# EAGLE board pgb_tsc (EAGLE 9.7.0)
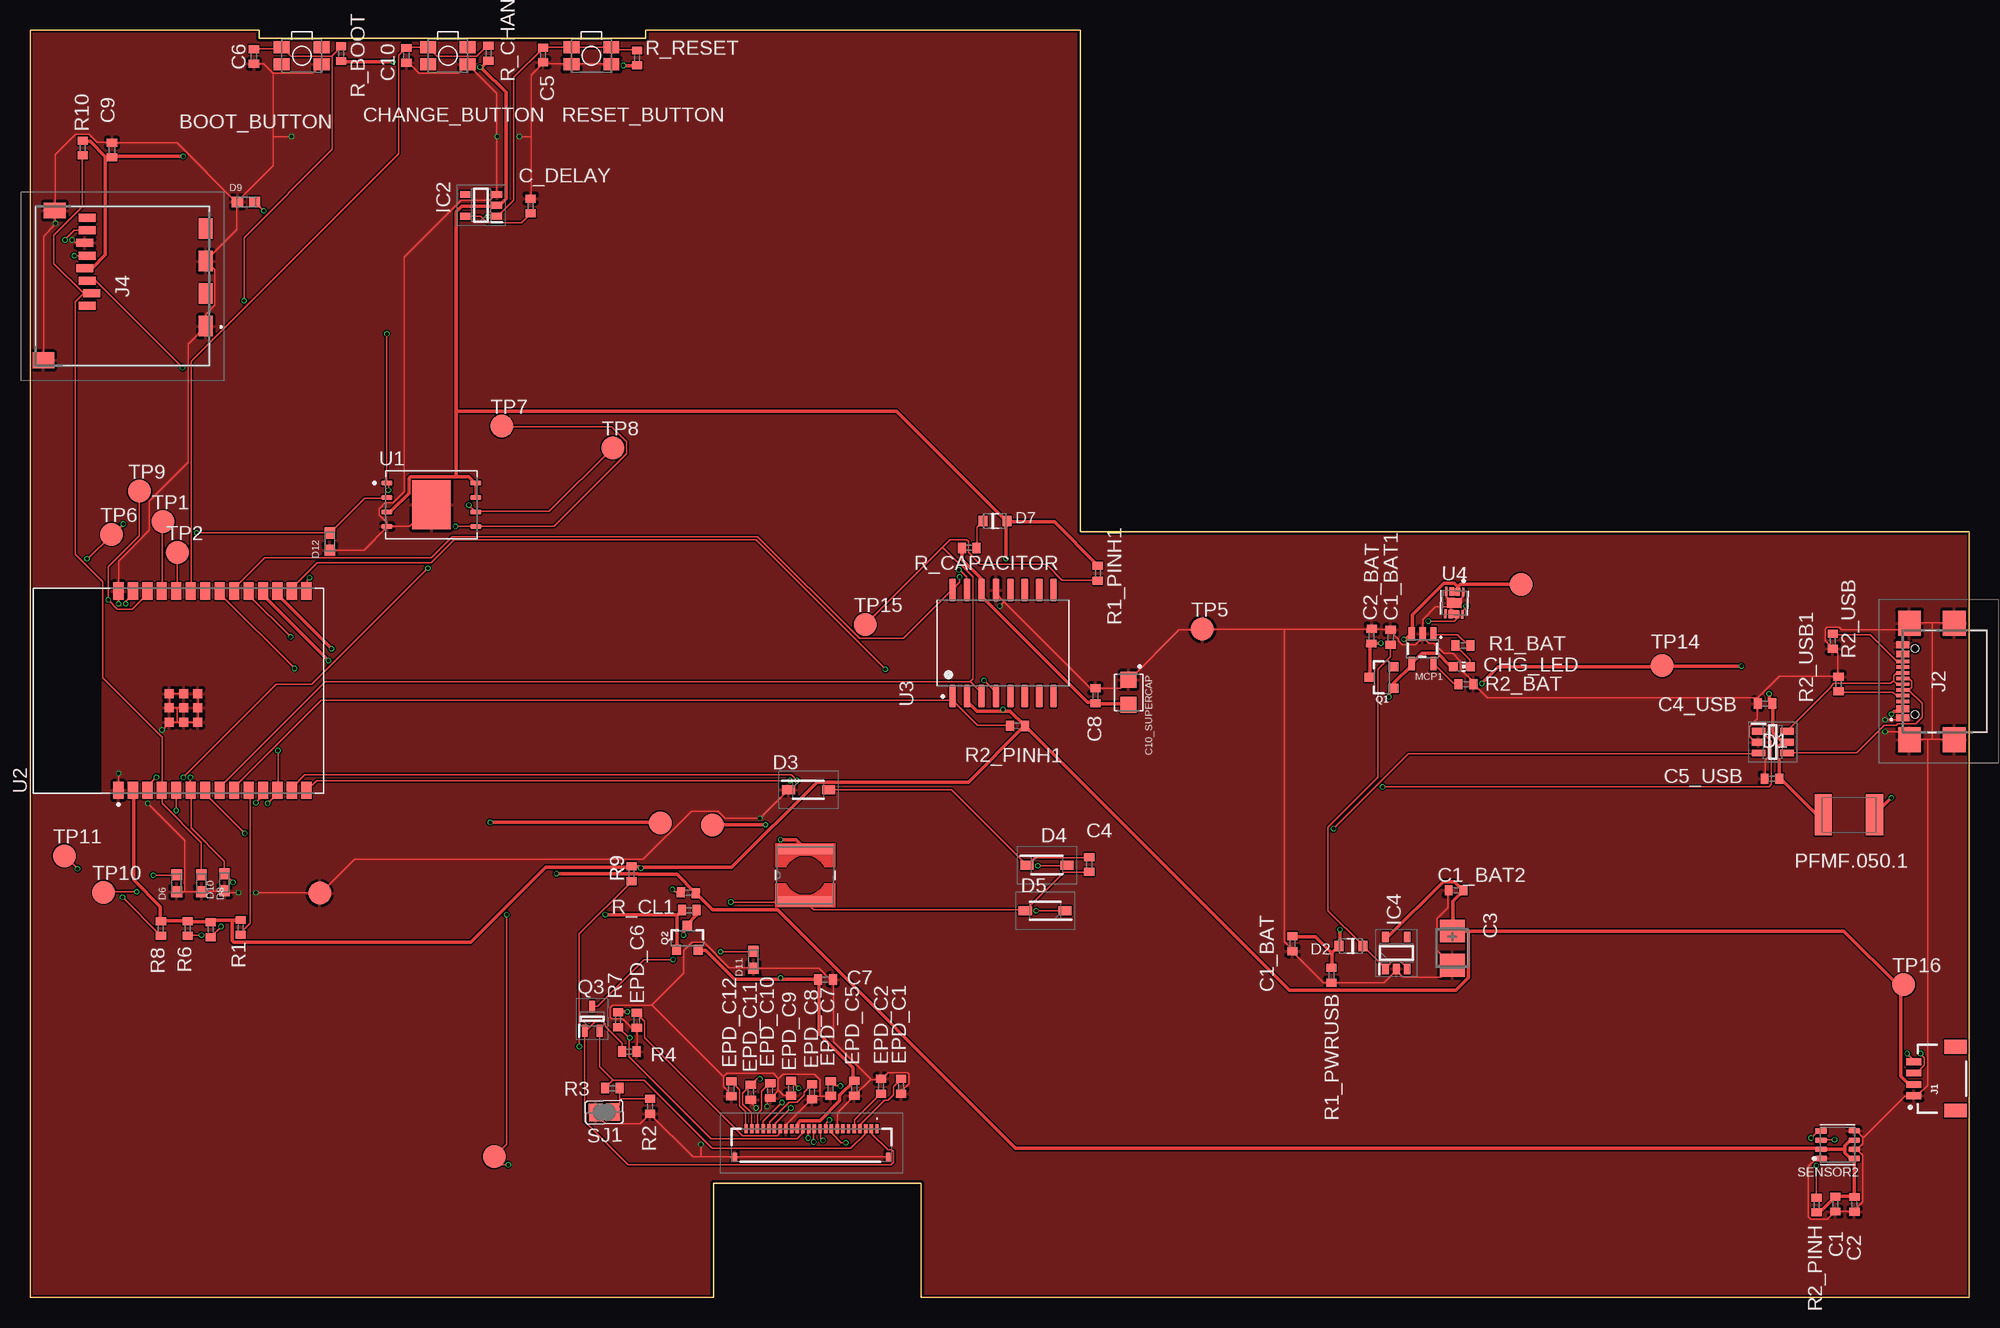
[diagram p0: board, top side]
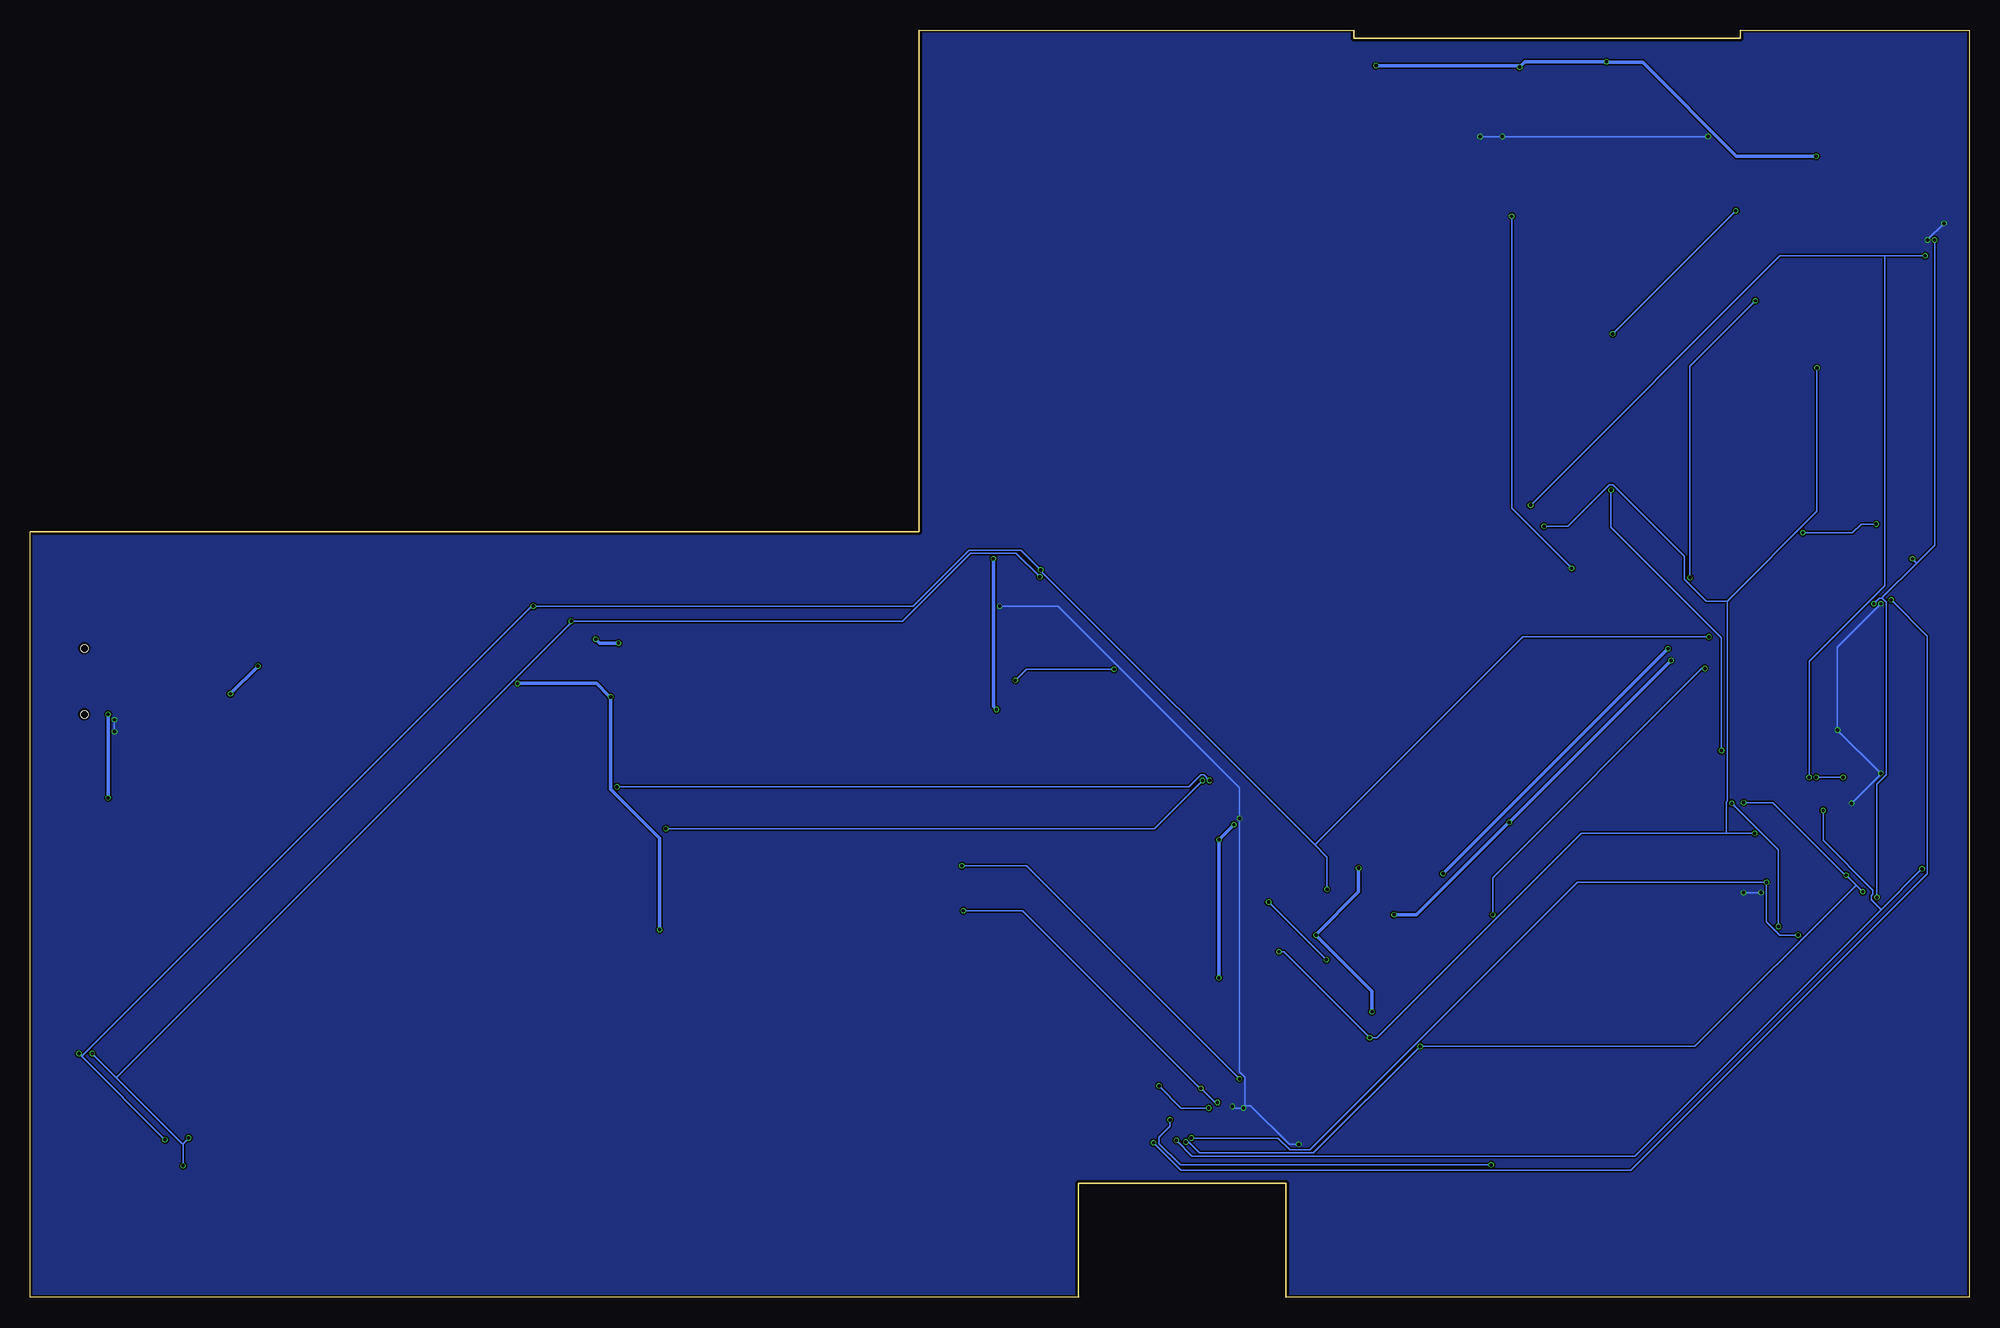
[diagram p1: board, bottom side, seen from below]

Size 170.2 x 111.2 mm. Coordinates in mm from the lower left corner, seen from the top.
Outline: 0,0 60,0 60,10 78.2,10 78.2,0 170.2,0 170.2,67.2 92.2,67.2 92.2,111.2 54,111.2 54,110.5 20.1,110.5 20.1,111.2 0,111.2 0,0
Copper layers (1*16): Top 0.035mm / dielectric 1.6mm / Bottom 0.035mm
Design rules "jlcpcb-2layers.dru *": minimum track width 5mil, minimum drill 0.3mm, track to track 5mil, track to pad 5mil, pad to pad 5mil, via to via 5mil, smd to smd 5mil, copper to edge 0.2mm, drill to drill 6mil, minimum pad ring 10mil, minimum via ring 3mil, stop-mask expansion 4mil, vias tented up to drill 0mil, thermal gap 10mil
Net classes: 0 default: width 0.15 mm; 1 power: width 0.3 mm

## Footprints (pad centres in the part's own frame; a part is rotated, then mirrored left to right if it is on the bottom)
MYBUTTON = smd 1.4 x 1.05: 1 1.75,0.75; 2 -1.75,0.75; 3 -1.75,-0.75; 4 1.75,-0.75
EAGLE-LTSPICE_C0402 = smd 0.7 x 0.9: 1 -0.65,0; 2 0.65,0
RCL_CT3528 = smd 2 x 2.2: + -1.5,0; - 1.5,0
CAPCP3225X100N = smd 1.4 x 1.4: 1 -1.1,0; 2 1.1,0
ADAFRUIT_CHIP-LED0603 = smd 0.8 x 0.8: A 0,-0.75; C 0,0.75
SOT95P280X145-6N = smd 1.2 x 0.6: 1 -1.25,0.95; 2 -1.25,0; 3 -1.25,-0.95; 4 1.25,-0.95; 5 1.25,0; 6 1.25,0.95
ESP32_WROVER_AVX---SD0805S020S1R0_AVX_SD0805S020S1R0_0 = smd 0.8 x 0.9: 1 -1.05,0; 2 1.05,0
SOD3716X135N = smd 1.15 x 0.8: 1 -1.75,0; 2 1.75,0
DIOC1608X36N = smd 0.97 x 0.94: 1 -0.75,0; 2 0.75,0
FH34SRJ24S05SH99 = smd 0.3 x 0.8: 1 5.75,1.45; 2 5.25,1.45; 3 4.75,1.45; 4 4.25,1.45; 5 3.75,1.45; 6 3.25,1.45; 7 2.75,1.45; 8 2.25,1.45; 9 1.75,1.45; 10 1.25,1.45; 11 0.75,1.45; 12 0.25,1.45; 13 -0.25,1.45; 14 -0.75,1.45; 15 -1.25,1.45; 16 -1.75,1.45; 17 -2.25,1.45; 18 -2.75,1.45; 19 -3.25,1.45; 20 -3.75,1.45; 21 -4.25,1.45; 22 -4.75,1.45; 23 -5.25,1.45; 24 -5.75,1.45 | smd 0.4 x 0.8: MP1 6.75,-1.05; MP2 -6.75,-1.05
SOT95P280X125-5N = smd 0.9 x 0.6: 1 -1.4,0.95; 2 -1.4,0; 3 -1.4,-0.95; 4 1.4,-0.95; 5 1.4,0.95
SOT95P280X120-5N = smd 0.9 x 0.6: 1 -1.4,0.95; 2 -1.4,0; 3 -1.4,-0.95; 4 1.4,-0.95; 5 1.4,0.95
JST04_1MM_RA = smd 0.6 x 1.35: 1 -1.5,0; 2 -0.5,0; 3 0.5,0; 4 1.5,0 | smd 1.2 x 2: NC1 2.8,-3.675; NC2 -2.8,-3.675
SAMACSYS_PARTS_USB4110GFA = smd 0.3 x 1.15: A1 -3.35,3.678; A4 -2.55,3.678; A5 -1.25,3.678; A6 -0.25,3.678; A7 0.25,3.678; A8 1.25,3.678; A9 2.55,3.678; A12 3.35,3.678; B1 3.05,3.678; B4 2.25,3.678; B5 1.75,3.678; B6 0.75,3.678; B7 -0.75,3.678; B8 -1.75,3.678; B9 -2.25,3.678; B12 -3.05,3.678 | smd 2.18 x 2: MP1 -5.11,-0.827; MP2 5.11,-0.827; MP3 -5.11,3.103; MP4 5.11,3.103 | hole 0.65: -2.89,2.603; 2.89,2.603
112ATAARR03ATTEND = smd 1.8 x 1.2: G1 10.6,10.4; G2 4.9,10.4; S1 7.75,10.4; S2 2.05,10.4 | smd 1.4 x 1.9: G3 13.6,-3.85; G4 0.45,-2.85 | smd 0.7 x 1.5: P1 8.8,0; P2 7.7,0.4; P3 6.6,0; P4 5.5,-0.2; P5 4.4,0; P6 3.3,-0.2; P7 2.2,0; P8 1.1,0
IND_4828-WE-TPC_WRE = smd 0.889 x 4.826: 1 -2.286,0; 2 2.286,0
ESP32_WROVER_SPARKFUN-IC-POWER_SOT23-5 = smd 0.55 x 1.2: 1 -0.95,-1.3; 2 0,-1.3; 3 0.95,-1.3; 4 0.95,1.3; 5 -0.95,1.3
ESP32C6_VARISTOR_CT/CN1812 = smd 1.5 x 3.6: 1 -2.25,0; 2 2.25,0
ESP32_WROVER_SPARKFUN-DISCRETESEMI_SOT23-3 = smd 0.8 x 0.9: 1 -0.95,-1; 2 0.95,-1; 3 0,1.1
SOT65P210X110-3N = smd 1.05 x 0.5: 1 -1.05,0.65; 2 -1.05,-0.65; 3 1.05,0
ESP32_WROVER_EAGLE-LTSPICE_R0402 = smd 0.7 x 0.9: 1 -0.65,0; 2 0.65,0
ESP32_WROVER_BME680_PSON80P300X300X100-8N = smd 1.016 x 0.5: 1 1.458,1.2; 2 1.458,0.4; 3 1.458,-0.4; 4 1.458,-1.2; 5 -1.458,-1.22; 6 -1.458,-0.4; 7 -1.458,0.4; 8 -1.458,1.2
SJ = smd 1.168 x 1.6: 1 -0.762,0; 2 0.762,0
TP20R = smd 2 x 2: TP 0,0
SON127P600X800X80-9N = smd 0.94 x 0.44: 1 -3.895,1.905; 2 -3.895,0.635; 3 -3.895,-0.635; 4 -3.895,-1.905; 5 3.895,-1.905; 6 3.895,-0.635; 7 3.895,0.635; 8 3.895,1.905 | smd 3.4 x 4.3: 9 0,0
XCVR_ESP32-C6-WROOM-1-N8 = smd 1.5 x 0.9: 1 -8.75,5.26; 2 -8.75,3.99; 3 -8.75,2.72; 4 -8.75,1.45; 5 -8.75,0.18; 6 -8.75,-1.09; 7 -8.75,-2.36; 8 -8.75,-3.63; 9 -8.75,-4.9; 10 -8.75,-6.17; 11 -8.75,-7.44; 12 -8.75,-8.71; 13 -8.75,-9.98; 14 -8.75,-11.25; 15 8.75,-11.25; 16 8.75,-9.98; 17 8.75,-8.71; 18 8.75,-7.44; 19 8.75,-6.17; 20 8.75,-4.9; 21 8.75,-3.63; 22 8.75,-2.36; 23 8.75,-1.09; 24 8.75,0.18; 25 8.75,1.45; 26 8.75,2.72; 27 8.75,3.99; 28 8.75,5.26 | smd 0.8 x 0.8: 29_1 -2.755,0.79; 29_2 -1.505,0.79; 29_3 -0.255,0.79; 29_4 -2.755,-0.46; 29_5 -1.505,-0.46; 29_6 -0.255,-0.46; 29_7 -2.755,-1.71; 29_8 -1.505,-1.71; 29_9 -0.255,-1.71
SOIC127P1032X265-16N = smd 2.05 x 0.59: 1 -4.655,4.445; 2 -4.655,3.175; 3 -4.655,1.905; 4 -4.655,0.635; 5 -4.655,-0.635; 6 -4.655,-1.905; 7 -4.655,-3.175; 8 -4.655,-4.445; 9 4.655,-4.445; 10 4.655,-3.175; 11 4.655,-1.905; 12 4.655,-0.635; 13 4.655,0.635; 14 4.655,1.905; 15 4.655,3.175; 16 4.655,4.445
SON50P200X200X80-9N = smd 0.76 x 0.27: 1 -0.985,0.75; 4 -0.985,-0.75; 5 0.985,-0.75; 8 0.985,0.75 | smd 0.762 x 0.483: 2 -0.985,0.25; 3 -0.985,-0.25; 6 0.985,-0.25; 7 0.985,0.25 | smd 0.9 x 1.3: 9 0,0

## Placement (x,y rotation side)
BOOT_BUTTON  BUTTON_CUSYOMV1  [MYBUTTON]  23.84,108.95 180 top
C1  100nF  [EAGLE-LTSPICE_C0402]  158.44,8.19 270 top
C1_BAT  4.7uF  [EAGLE-LTSPICE_C0402]  110.79,31.03 270 top
C1_BAT1  4.7uF  [EAGLE-LTSPICE_C0402]  119.41,57.93 90 top
C1_BAT2  4.7uF  [EAGLE-LTSPICE_C0402]  125.15,35.73 180 top
C2  100nF  [EAGLE-LTSPICE_C0402]  160.12,8.16 270 top
C2_BAT  4.7uF  [EAGLE-LTSPICE_C0402]  117.73,58.03 88.3 top
C3  100uF TANT  [RCL_CT3528]  124.82,30.65 270 top
C4  4.7uF/25V  [EAGLE-LTSPICE_C0402]  92.95,37.99 270 top
C4_USB  100nF  [EAGLE-LTSPICE_C0402]  152.27,52.11 180 top
C5  1uF  [EAGLE-LTSPICE_C0402]  45.02,109.02 270 top
C5_USB  4.7uF  [EAGLE-LTSPICE_C0402]  152.88,45.51 180 top
C6  100nF  [EAGLE-LTSPICE_C0402]  19.64,108.89 270 top
C7  10uF  [EAGLE-LTSPICE_C0402]  69.8,27.89 0 top
C8  100nF  [EAGLE-LTSPICE_C0402]  93.5,52.79 90 top
C9  100nF  [EAGLE-LTSPICE_C0402]  7.18,100.69 90 top
C10  100nF  [EAGLE-LTSPICE_C0402]  33.02,108.99 270 top
C10_SUPERCAP  CPH3225A  [CAPCP3225X100N]  96.4,53.1 270 top
C_DELAY  100nF  [EAGLE-LTSPICE_C0402]  43.93,95.77 270 top
CHANGE_BUTTON  BUTTON_CUSYOMV1  [MYBUTTON]  36.66,108.95 180 top
CHG_LED  [ADAFRUIT_CHIP-LED0603]  125.67,55.35 270 top
D1  USBLC6-2SC6Y  [SOT95P280X145-6N]  152.95,48.73 0 top
D2  ESP32_WROVER_AVX---SD0805S020S1R0_AVX_SD0805S020S1R0_0_0AVX_SD0805S020S1R0_0_0  [ESP32_WROVER_AVX---SD0805S020S1R0_AVX_SD0805S020S1R0_0]  115.92,30.84 180 top
D3  MBR0530  [SOD3716X135N]  68.31,44.54 0 top
D4  MBR0530  [SOD3716X135N]  89.25,37.94 0 top
D5  MBR0530  [SOD3716X135N]  89.09,33.94 180 top
D6  PGB1010603MR  [DIOC1608X36N]  12.85,36.34 90 top
D7  ESP32_WROVER_AVX---SD0805S020S1R0_AVX_SD0805S020S1R0_0_0AVX_SD0805S020S1R0_0_0  [ESP32_WROVER_AVX---SD0805S020S1R0_AVX_SD0805S020S1R0_0]  84.67,68.14 0 top
D8  PGB1010603MR  [DIOC1608X36N]  15.03,36.34 90 top
D9  PGB1010603MR  [DIOC1608X36N]  18.94,96.13 0 top
D10  PGB1010603MR  [DIOC1608X36N]  17.06,36.43 90 top
D11  PGB1010603MR  [DIOC1608X36N]  63.48,29.63 90 top
D12  PGB1010603MR  [DIOC1608X36N]  26.3,66.33 90 top
EPD_C1  1uF/50V  [EAGLE-LTSPICE_C0402]  76.43,18.53 90 top
EPD_C2  1uF/50V  [EAGLE-LTSPICE_C0402]  74.69,18.53 270 top
EPD_C5  0.1uF/50V  [EAGLE-LTSPICE_C0402]  72.33,18.35 90 top
EPD_C6  1uF/50V  [EAGLE-LTSPICE_C0402]  53.25,24.33 90 top
EPD_C7  1uF/50V  [EAGLE-LTSPICE_C0402]  70.26,18.33 90 top
EPD_C8  1uF/50V  [EAGLE-LTSPICE_C0402]  68.63,18.05 90 top
EPD_C9  1uF/50V  [EAGLE-LTSPICE_C0402]  66.79,18.35 90 top
EPD_C10  1uF/50V  [EAGLE-LTSPICE_C0402]  64.95,18.15 90 top
EPD_C11  1uF/50V  [EAGLE-LTSPICE_C0402]  63.25,18.01 90 top
EPD_C12  1uF/50V  [EAGLE-LTSPICE_C0402]  61.54,18.31 90 top
FH34SRJ-24S-0.5SH_99_1  FH34SRJ-24S-0.5SH_99_  [FH34SRJ24S05SH99]  68.58,13.35 0 top
IC2  BD5229G-TR  [SOT95P280X125-5N]  39.57,95.83 180 top
IC4  XC6220A331MR-G  [SOT95P280X120-5N]  119.91,30.23 90 top
J1  QWIIC_RIGHT_ANGLE  [JST04_1MM_RA]  165.32,19.19 90 top
J2  SAMACSYS_PARTS_USB4110-GF-A  [SAMACSYS_PARTS_USB4110GFA]  168.06,54.06 90 top
J4  112A-TAAR-R03_ATTEND  [112ATAARR03ATTEND]  5,95.83 270 top
L1  68uH  [IND_4828-WE-TPC_WRE]  68.03,37.05 89.9 top
MCP1  ESP32_WROVER_SPARKFUN-IC-POWER_MCP73831  [ESP32_WROVER_SPARKFUN-IC-POWER_SOT23-5]  122.21,56.92 180 top
PFMF.050.1  ESP32C6_VARISTORCN1812  [ESP32C6_VARISTOR_CT/CN1812]  159.63,42.34 180 top
Q1  20V/4.2A/52mΩ/1.4W  [ESP32_WROVER_SPARKFUN-DISCRETESEMI_SOT23-3]  118.66,54.41 90 top
Q2  20V/4.2A/52mΩ/1.4W  [ESP32_WROVER_SPARKFUN-DISCRETESEMI_SOT23-3]  57.68,31.51 0 top
Q3  SI1308EDL-T1-GE3  [SOT65P210X110-3N]  49.32,24.44 90 top
R1  10k  [ESP32_WROVER_EAGLE-LTSPICE_R0402]  18.47,32.47 90 top
R1_BAT  200  [ESP32_WROVER_EAGLE-LTSPICE_R0402]  125.76,57.21 0 top
R1_PINH  10k  [ESP32_WROVER_EAGLE-LTSPICE_R0402]  57.76,35.51 356.7 top
R1_PINH1  10k  [ESP32_WROVER_EAGLE-LTSPICE_R0402]  93.71,63.55 270 top
R1_PWRUSB  100k  [ESP32_WROVER_EAGLE-LTSPICE_R0402]  114.22,28.27 90 top
R2  2.2  [ESP32_WROVER_EAGLE-LTSPICE_R0402]  54.41,16.77 90 top
R2_BAT  2K  [ESP32_WROVER_EAGLE-LTSPICE_R0402]  126.02,53.81 180 top
R2_PINH  10k  [ESP32_WROVER_EAGLE-LTSPICE_R0402]  156.8,8.11 270 top
R2_PINH1  10k  [ESP32_WROVER_EAGLE-LTSPICE_R0402]  86.65,50.15 179.6 top
R2_USB  5k1  [ESP32_WROVER_EAGLE-LTSPICE_R0402]  158.23,57.59 270 top
R2_USB1  5k1  [ESP32_WROVER_EAGLE-LTSPICE_R0402]  158.72,53.83 270 top
R3  0.47  [ESP32_WROVER_EAGLE-LTSPICE_R0402]  51.09,18.37 180 top
R4  10k  [ESP32_WROVER_EAGLE-LTSPICE_R0402]  52.59,21.57 180 top
R5  10K  [ESP32_WROVER_EAGLE-LTSPICE_R0402]  15.85,32.27 90 top
R6  10K  [ESP32_WROVER_EAGLE-LTSPICE_R0402]  13.83,32.37 90 top
R7  10K  [ESP32_WROVER_EAGLE-LTSPICE_R0402]  51.61,24.37 90 top
R8  10K  [ESP32_WROVER_EAGLE-LTSPICE_R0402]  11.47,32.37 90 top
R9  10K  [ESP32_WROVER_EAGLE-LTSPICE_R0402]  52.79,37.17 90 top
R10  10K  [ESP32_WROVER_EAGLE-LTSPICE_R0402]  4.61,100.87 90 top
R_BOOT  10K  [ESP32_WROVER_EAGLE-LTSPICE_R0402]  27.29,109.15 270 top
R_CAPACITOR  15  [ESP32_WROVER_EAGLE-LTSPICE_R0402]  82.42,65.77 0 top
R_CHANGE  10K  [ESP32_WROVER_EAGLE-LTSPICE_R0402]  40.22,109.17 270 top
R_CL1  10k  [ESP32_WROVER_EAGLE-LTSPICE_R0402]  57.86,33.99 0 top
R_RESET  10K  [ESP32_WROVER_EAGLE-LTSPICE_R0402]  53.26,108.77 270 top
RESET_BUTTON  BUTTON_CUSYOMV1  [MYBUTTON]  49.26,108.95 180 top
SENSOR2  ESP32_WROVER_BME680_BME680  [ESP32_WROVER_BME680_PSON80P300X300X100-8N]  158.64,13.4 180 top
SJ1  [SJ]  50.38,16.25 2.2 top
TP1  TPTP20R  [TP20R]  11.66,68.07 0 top
TP2  TPTP20R  [TP20R]  12.91,65.37 0 top
TP3  TPTP20R  [TP20R]  130.86,62.57 0 top
TP4  TPTP20R  [TP20R]  25.41,35.47 0 top
TP5  TPTP20R  [TP20R]  102.89,58.65 0 top
TP6  TPTP20R  [TP20R]  7.14,66.95 0 top
TP7  TPTP20R  [TP20R]  41.39,76.45 0 top
TP8  TPTP20R  [TP20R]  51.14,74.55 0 top
TP9  TPTP20R  [TP20R]  9.59,70.75 0 top
TP10  TPTP20R  [TP20R]  6.44,35.55 0 top
TP11  TPTP20R  [TP20R]  2.99,38.75 0 top
TP12  TPTP20R  [TP20R]  40.74,12.35 0 top
TP13  TPTP20R  [TP20R]  55.29,41.65 0 top
TP14  TPTP20R  [TP20R]  143.24,55.45 0 top
TP15  TPTP20R  [TP20R]  73.29,59.05 0 top
TP16  TPTP20R  [TP20R]  164.44,27.45 0 top
TP17  TPTP20R  [TP20R]  59.89,41.45 0 top
U1  W25Q512JVEIQ  [SON127P600X800X80-9N]  35.22,69.56 0 top
U2  ESP32-C6-WROOM-1-N8  [XCVR_ESP32-C6-WROOM-1-N8]  13,53.24 90 top
U3  DS3231SN#  [SOIC127P1032X265-16N]  85.39,57.42 90 top
U4  MAX17048G+T10  [SON50P200X200X80-9N]  125,60.95 267.8 top

## Library data of the parts
BOOT_BUTTON CHANGE_BUTTON CHG_LED PFMF.050.1 RESET_BUTTON SJ1 TP1-TP17 = DeskAssistant v19 v1
C1 C1_BAT C1_BAT1 C1_BAT2 C2 C2_BAT C4 C4_USB C5 C5_USB C6-C10 C_DELAY EPD_C1 EPD_C2 EPD_C5-EPD_C12 = DeskAssistant v19 v1; SPICEMODEL: NONE; SPICEPREFIX: C
C3 = DeskAssistant v19 v1; SPICEPREFIX: C
C10_SUPERCAP = DeskAssistant v19 v1; AVAILABILITY: Not in stock; CHECK_PRICES: https://www.snapeda.com/parts/CPH3225A/Seiko+Instruments/view-part/?ref=eda; DESCRIPTION: 11 mF (EDLC) Supercapacitor 3.3 V 1210 (3225 Metric) - -; MF: Seiko Instruments; MP: CPH3225A; PACKAGE: 1210 Seiko; PRICE: None; PURCHASE-URL: https://www.snapeda.com/api/url_track_click_mouser/?unipart_id=562593&manufacturer=Seiko Instruments&part_name=CPH3225A&search_term=None; SNAPEDA_LINK: https://www.snapeda.com/parts/CPH3225A/Seiko+Instruments/view-part/?ref=snap
D1 = DeskAssistant v19 v1; AVAILABILITY: In Stock; CHECK_PRICES: https://www.snapeda.com/parts/USBLC6-2SC6Y/STMicroelectronics/view-part/?ref=eda; DESCRIPTION: 17V Clamp 5A (8/20µs) Ipp Tvs Diode Surface Mount SOT-23-6; MF: STMicroelectronics; MP: USBLC6-2SC6Y; PACKAGE: SOT-23-6 STMicroelectronics; PRICE: None; SNAPEDA_LINK: https://www.snapeda.com/parts/USBLC6-2SC6Y/STMicroelectronics/view-part/?ref=snap
D2 D7 = DeskAssistant v19 v1; CENTROID_NOT_SPECIFIED: No; DATASHEET: http://datasheets.avx.com/schottky.pdf; DIGIKEY_DESCRIPTION: DIODE SCHOTTKY 20V 1A 0805; DIGIKEY_PART_NUMBER: 478-7800-1-ND; LEAD_FREE: yes; MF: AVX; MOUSER_PART_NUMBER: 581-SD0805S020S1R0; PACKAGE: 0805 (2012 metric); PREFIX: D; ROHS: yes; TEMPERATURE_RANGE_HIGH: +125°C; TEMPERATURE_RANGE_LOW: -55°C
D3-D5 = DeskAssistant v19 v1; AVAILABILITY: In Stock; CHECK_PRICES: https://www.snapeda.com/parts/MBR0530/Onsemi/view-part/?ref=eda; DESCRIPTION: Diode Schottky 30 V 500mA Surface Mount SOD-123; MF: ON Semiconductor; MP: MBR0530; PACKAGE: SOD-123-2 ON Semiconductor; PRICE: None; PURCHASE-URL: https://www.snapeda.com/api/url_track_click_mouser/?unipart_id=179458&manufacturer=ON Semiconductor&part_name=MBR0530&search_term=None; SNAPEDA_LINK: https://www.snapeda.com/parts/MBR0530/Onsemi/view-part/?ref=snap
D6 D8-D12 = DeskAssistant v19 v1; AVAILABILITY: In Stock; CHECK_PRICES: https://www.snapeda.com/parts/PGB1010603MR/Littelfuse/view-part/?ref=eda; DESCRIPTION: 150V (Typ) Clamp - Ipp Tvs Diode Surface Mount 0603 (1608 Metric); MF: Littelfuse Inc.; MP: PGB1010603MR; PACKAGE: 0603 Littelfuse Inc.; PRICE: None; PURCHASE-URL: https://www.snapeda.com/api/url_track_click_mouser/?unipart_id=5659453&manufacturer=Littelfuse Inc.&part_name=PGB1010603MR&search_term=None; SNAPEDA_LINK: https://www.snapeda.com/parts/PGB1010603MR/Littelfuse/view-part/?ref=snap
FH34SRJ-24S-0.5SH_99_1 = DeskAssistant v19 v1; DESCRIPTION: 24 Position FFC, FPC Connector Contacts, Top and Bottom 0.020" (0.50mm) Surface Mount, Right Angle; HEIGHT: 1.1mm; MANUFACTURER_NAME: Hirose; MANUFACTURER_PART_NUMBER: FH34SRJ-24S-0.5SH(99); MOUSER_PART_NUMBER: 798-FH34SRJ24S05SH99; MOUSER_PRICE-STOCK: https://www.mouser.co.uk/ProductDetail/Hirose-Connector/FH34SRJ-24S-0.5SH99?qs=vcbW%252B4%252BSTIpKBl5ap9J8Fw%3D%3D
IC2 = DeskAssistant v19 v1; DESCRIPTION: Voltage Detector with Adjustable Delay Time: CMOS processes are utilized to develop high precision, low current consumption CMOS reset ICs that allow arbitrary setting of the delay time. The extensive lineup includes both Nch Open Drain and CMOS output types in a wide range of detection voltages (from 2.3V to 6.0V, in 0.1V steps), enabling selection of the ideal solution based on customer requirements. In addition, the entire series is of course both lead-free and RoHS-compliant.; HEIGHT: 1.25mm; MANUFACTURER_NAME: ROHM Semiconductor; MANUFACTURER_PART_NUMBER: BD5229G-TR; MOUSER_PART_NUMBER: 755-BD5229G-TR; MOUSER_PRICE-STOCK: https://www.mouser.co.uk/ProductDetail/ROHM-Semiconductor/BD5229G-TR?qs=4kLU8WoGk0vvnhrrYwdszw%3D%3D
IC4 = DeskAssistant v19 v1; DESCRIPTION: LDO Voltage Regulators; HEIGHT: 1.2mm; MANUFACTURER_NAME: Torex; MANUFACTURER_PART_NUMBER: XC6220A331MR-G; MOUSER_PART_NUMBER: 865-XC6220A331MR-G; MOUSER_PRICE-STOCK: https://www.mouser.co.uk/ProductDetail/Torex-Semiconductor/XC6220A331MR-G?qs=AsjdqWjXhJ8ZSWznL1J0gg%3D%3D
J1 = DeskAssistant v19 v1; PROD_ID: CONN-13694
J2 = DeskAssistant v19 v1; DESCRIPTION: CONN USB 2.0 TYPE-C R/A SMT; HEIGHT: 3.26mm; MANUFACTURER_NAME: GCT (GLOBAL CONNECTOR TECHNOLOGY); MANUFACTURER_PART_NUMBER: USB4110-GF-A; MOUSER_PART_NUMBER: 640-USB4110-GF-A; MOUSER_PRICE-STOCK: https://www.mouser.co.uk/ProductDetail/GCT/USB4110-GF-A?qs=KUoIvG%2F9IlYiZvIXQjyJeA%3D%3D
J4 = DeskAssistant v19 v1; DESCRIPTION: Micro SD Card Socket, Push-Push Type, Top Mount, SMT, H=1.83mm, 10u; HEIGHT: 1.9mm; MANUFACTURER_NAME: ATTEND; MANUFACTURER_PART_NUMBER: 112A-TAAR-R03 ATTEND
L1 = DeskAssistant v19 v1; COPYRIGHT: Copyright (C) 2024 Ultra Librarian. All rights reserved.; MANUFACTURER_PART_NUMBER: 744043680; MFR_NAME: Wurth Electronics
MCP1 = DeskAssistant v19 v1; PROD_ID: IC-09995
Q1 Q2 = DeskAssistant v19 v1; PROD_ID: TRAN-14388
Q3 = DeskAssistant v19 v1; AVAILABILITY: In Stock; CHECK_PRICES: https://www.snapeda.com/parts/SI1308EDL-T1-GE3/Vishay+Siliconix/view-part/?ref=eda; DESCRIPTION: Si1308EDL-T1-GE3 N-channel MOSFET Transistor, 1.5 A, 30 V, 3-Pin SC-70 | Siliconix / Vishay SI1308EDL-T1-GE3; MF: Vishay Siliconix; MP: SI1308EDL-T1-GE3; PACKAGE: SOT-323 Vishay Semiconductor; PRICE: None; PURCHASE-URL: https://www.snapeda.com/api/url_track_click_mouser/?unipart_id=274603&manufacturer=Vishay Siliconix&part_name=SI1308EDL-T1-GE3&search_term=None; SNAPEDA_LINK: https://www.snapeda.com/parts/SI1308EDL-T1-GE3/Vishay+Siliconix/view-part/?ref=snap
R1 R1_BAT R1_PINH R1_PINH1 R1_PWRUSB R2 R2_BAT R2_PINH R2_PINH1 R2_USB R2_USB1 R3-R10 R_BOOT R_CAPACITOR R_CHANGE R_CL1 R_RESET = DeskAssistant v19 v1; SPICEMODEL: NONE; SPICEPREFIX: R
SENSOR2 = DeskAssistant v19 v1; AVAILABILITY: Unavailable; DESCRIPTION: Integrated Environmental Unit; MF: Bosch Sensortec; MP: BME680; PACKAGE: LGA-8 Bosch Tools; PRICE: None
U1 = DeskAssistant v19 v1; AVAILABILITY: In Stock; CHECK_PRICES: https://www.snapeda.com/parts/W25Q512JVEIQ/Winbond+Electronics/view-part/?ref=eda; DESCRIPTION: FLASH - NOR Memory IC 512Mb (64M x 8) SPI - Quad I/O 133 MHz 8-WSON (8x6); MF: Winbond Electronics; MP: W25Q512JVEIQ; PACKAGE: Package; PRICE: None; SNAPEDA_LINK: https://www.snapeda.com/parts/W25Q512JVEIQ/Winbond+Electronics/view-part/?ref=snap
U2 = DeskAssistant v19 v1; AVAILABILITY: In Stock; CHECK_PRICES: https://www.snapeda.com/parts/ESP32-C6-WROOM-1-N8/Espressif+Systems/view-part/?ref=eda; DESCRIPTION: Multiprotocol Modules ESP32-C6 module, Wi-Fi 6 in 2.4 GHz band, Bluetooth 5, Zigbee 3.0 and Thread. ESP34-WROOM Compatible - ENGINEERING SAMPLE; MF: Espressif Systems; MP: ESP32-C6-WROOM-1-N8; PACKAGE: None; PRICE: None; SNAPEDA_LINK: https://www.snapeda.com/parts/ESP32-C6-WROOM-1-N8/Espressif+Systems/view-part/?ref=snap
U3 = DeskAssistant v19 v1; AVAILABILITY: In Stock; CHECK_PRICES: https://www.snapeda.com/parts/DS3231SN%23/Analog+Devices/view-part/?ref=eda; DESCRIPTION: Extremely Accurate I²C-Integrated RTC/TCXO/Crystal; MF: Analog Devices; MP: DS3231SN#; PACKAGE: SOIC-16 Maxim; PRICE: None; PURCHASE-URL: https://www.snapeda.com/api/url_track_click_mouser/?unipart_id=99048&manufacturer=Analog Devices&part_name=DS3231SN#&search_term=None; SNAPEDA_LINK: https://www.snapeda.com/parts/DS3231SN%23/Analog+Devices/view-part/?ref=snap
U4 = DeskAssistant v19 v1; AVAILABILITY: In Stock; CHECK_PRICES: https://www.snapeda.com/parts/MAX17048G+T10/Analog+Devices/view-part/?ref=eda; DESCRIPTION: 3µA 1-Cell/2-Cell Fuel Gauge with ModelGauge; MF: Analog Devices; MP: MAX17048G+T10; PACKAGE: TDFN-8 Maxim; PRICE: None; PURCHASE-URL: https://www.snapeda.com/api/url_track_click_mouser/?unipart_id=329239&manufacturer=Analog Devices&part_name=MAX17048G+T10&search_term=None; SNAPEDA_LINK: https://www.snapeda.com/parts/MAX17048G+T10/Analog+Devices/view-part/?ref=snap

## Nets
3V3 [power]: C1_BAT2.1 C3.+ C9.1 D7.2 IC2.2 IC4.5 J1.2 J4.P4 Q2.3 R1.2 R1_PINH1.1 R2_PINH1.1 R5.2 R6.2 R7.2 R8.2 R9.2 R10.2 R_BOOT.2 R_CHANGE.2 R_CL1.2 R_RESET.2 TP16.TP U1.3 U1.7 U1.8 U2.2 U3.2
32KHZ: R2_PINH1.2 U2.9 U3.1
DN: D1.4 J2.A7 J2.B7
DP: D1.6 J2.A6 J2.B6
EPD_3V3 [power]: C7.1 EPD_C5.2 FH34SRJ-24S-0.5SH_99_1.15 FH34SRJ-24S-0.5SH_99_1.16 L1.2 Q2.2 TP17.TP
EPD_3V3_C [power]: Q2.1 R_CL1.1 TP13.TP U2.18
EPD_BUSY: FH34SRJ-24S-0.5SH_99_1.9 TP9.TP U2.26
EPD_CS: D6.2 FH34SRJ-24S-0.5SH_99_1.12 R9.1 TP10.TP U2.11
EPD_DC: FH34SRJ-24S-0.5SH_99_1.11 TP11.TP U2.5
EPD_RST: FH34SRJ-24S-0.5SH_99_1.10 TP12.TP U2.21
FLASH_CS: D9.2 R5.1 U1.1 U2.12
GDR: FH34SRJ-24S-0.5SH_99_1.2 Q3.1 R4.2
GND: BOOT_BUTTON.2 C1.2 C1_BAT1.2 C1_BAT2.2 C1_BAT.2 C2.2 C2_BAT.2 C3.- C4_USB.2 C5.2 C5_USB.2 C6.2 C7.2 C8.2 C9.2 C10.2 C10_SUPERCAP.1 C_DELAY.1 CHANGE_BUTTON.2 D1.2 D3.1 D6.1 D8.1 D9.1 D10.1 D11.1 D12.1 EPD_C1.1 EPD_C2.1 EPD_C5.1 EPD_C6.1 EPD_C7.1 EPD_C8.1 EPD_C9.1 EPD_C10.1 EPD_C11.1 EPD_C12.1 FH34SRJ-24S-0.5SH_99_1.8 FH34SRJ-24S-0.5SH_99_1.17 FH34SRJ-24S-0.5SH_99_1.MP1 FH34SRJ-24S-0.5SH_99_1.MP2 IC2.3 IC4.2 J1.1 J2.A1 J2.A12 J2.B1 J2.B12 J2.MP1 J2.MP2 J2.MP3 J2.MP4 J4.G1 J4.G2 J4.G3 J4.G4 J4.P6 MCP1.2 R1_PWRUSB.1 R2.1 R2_BAT.1 R2_USB1.1 R2_USB.2 R4.1 RESET_BUTTON.1 RESET_BUTTON.2 SENSOR2.1 SENSOR2.5 SENSOR2.7 SJ1.1 TP4.TP TP5.TP U1.4 U1.9 U2.1 U2.28 U2.29_1 U2.29_2 U2.29_3 U2.29_4 U2.29_5 U2.29_6 U2.29_7 U2.29_8 U2.29_9 U3.13 U4.1 U4.4 U4.6 U4.9
GPIO8: R1.1 U2.10
I2C_PW [power]: C1.1 C2.1 R1_PINH.2 R2_PINH.2 SENSOR2.2 SENSOR2.6 SENSOR2.8 U2.17
INT_RTC: R1_PINH1.2 TP15.TP U2.8 U3.3
IO/BOOT: BOOT_BUTTON.4 C6.1 R_BOOT.1 U2.15
IO/CHANGE: C10.1 CHANGE_BUTTON.4 R_CHANGE.1 U2.23
MISO: D12.2 J4.P7 R8.1 TP6.TP U1.2 U2.27
MOSI: D11.2 FH34SRJ-24S-0.5SH_99_1.14 J4.P3 R7.1 TP7.TP U1.5 U2.7
N$1: EPD_C10.2 FH34SRJ-24S-0.5SH_99_1.22
N$11: J2.A5 R2_USB1.2
N$15: J2.B5 R2_USB.1
N$16: C1_BAT1.1 D2.1 IC4.1 IC4.3
N$17: C4.1 D3.2 D4.1
N$18: MCP1.1 R1_BAT.2
N$19: CHG_LED.C R1_BAT.1
N$20: MCP1.5 R2_BAT.2
N$21: EPD_C12.2 FH34SRJ-24S-0.5SH_99_1.24
N$22: EPD_C8.2 FH34SRJ-24S-0.5SH_99_1.20
N$23: EPD_C7.2 FH34SRJ-24S-0.5SH_99_1.19
N$24: EPD_C6.2 FH34SRJ-24S-0.5SH_99_1.18
N$25: EPD_C2.2 FH34SRJ-24S-0.5SH_99_1.5
N$26: EPD_C1.2 FH34SRJ-24S-0.5SH_99_1.4
N$27: C_DELAY.2 IC2.5
N$28: D7.1 R_CAPACITOR.2
PREVGH: D5.1 EPD_C9.2 FH34SRJ-24S-0.5SH_99_1.21
PREVGL: D4.2 EPD_C11.2 FH34SRJ-24S-0.5SH_99_1.23
RESE: FH34SRJ-24S-0.5SH_99_1.3 Q3.2 R3.2
RESE': R2.2 R3.1 SJ1.2
RESET: C5.1 IC2.1 R_RESET.1 RESET_BUTTON.3 RESET_BUTTON.4 U2.3
RTC_RST: U2.16 U3.4
RX: TP2.TP U2.24
SCK: D10.2 FH34SRJ-24S-0.5SH_99_1.13 J4.P5 R6.1 TP8.TP U1.6 U2.6
SCL: J1.4 R2_PINH.1 SENSOR2.4 U2.20 U3.16 U4.7
SDA: J1.3 R1_PINH.1 SENSOR2.3 U2.19 U3.15 U4.8
SRC: C4.2 D5.2 L1.1 Q3.3
SS_SD: D8.2 J4.P2 R10.1 U2.4
TX: TP1.TP U2.25
USB_D+: D1.1 U2.14
USB_D-: D1.3 U2.13
VBAT [power]: C2_BAT.1 MCP1.3 Q1.3 TP3.TP U4.2 U4.3
VBUS [power]: C1_BAT.1 C4_USB.1 C5_USB.1 CHG_LED.A D1.5 D2.2 MCP1.4 PFMF.050.1.2 Q1.1 R1_PWRUSB.2 TP14.TP
VRTC [power]: C8.1 C10_SUPERCAP.2 R_CAPACITOR.1 U3.14
VUSB [power]: J2.A4 J2.B4 J2.B9 PFMF.050.1.1

## Tracks (layer width: path | path; a pad name or v marks a point on that pad's centre or on a via)
3V3  (via drill 0.3)
  Top 0.3: 6.65,100.07 5.26,101.45 4.64,101.45 R10.2 | 6.65,100.07 7.13,100.07 C9.1 7.27,100.14 v13.43,100.14 | J4.P4 4.85,90.37 5.47,90.37 6.58,91.48 6.58,99.93 6.65,100.07 | 37.4,72.02 38.5,72.02 39.06,71.47 U1.8 39.13,71.33 39.13,70.22 U1.7 | 37.4,72.02 33.38,72.02 33.24,71.88 33.24,70.57 31.65,68.97 31.37,68.97 U1.3 | v31.86,108.45 27.35,108.45 R_BOOT.2 | 39.61,107.96 v39.47,107.96 | 39.61,107.96 40.16,108.52 R_CHANGE.2 | 39.61,107.96 39.68,107.82 41.76,105.75 41.76,96.4 41.2,95.84 41,95.84 IC2.2 40.86,95.77 37.88,95.77 37.4,95.29 37.4,77.77 | v52.08,108.1 53.25,108.1 R_RESET.2 | 37.4,77.77 37.4,72.02 | IC4.5 118.97,31.65 119.18,31.65 124.03,36.5 125,36.5 125.76,35.73 C1_BAT2.1 125.69,35.6 124.86,34.77 124.86,32.2 C3.+ 125,32.13 126.24,32.13 | J1.2 165.3,18.7 164.88,18.7 164.19,19.39 164.19,27.22 164.4,27.42 TP16.TP 164.05,27.29 159.21,32.13 126.24,32.13 | 17.73,33.1 15.86,33.1 R5.2 15.79,32.96 13.92,32.96 R6.2 13.78,33.03 11.49,33.03 R8.2 11.43,33.17 11.43,34.28 9.07,36.63 9.07,44.46 U2.2 | 17.73,33.1 18.42,33.1 R1.2 | D7.2 85.73,68.07 89.89,68.07 93.69,64.27 R1_PINH1.1 | 85.39,51.45 83.1,51.45 82.27,52.28 82.27,52.7 U3.2 | 85.39,51.45 86.01,51.45 87.25,50.21 R2_PINH1.1 | v52.42,25.07 51.66,25.07 R7.2 | v57.34,31.79 57.34,32.27 57.62,32.55 Q2.3 57.69,32.76 58.45,33.52 58.45,33.93 R_CL1.2 | R2_PINH1.1 87.19,50.07 82.34,45.22 69.04,45.22 61.56,37.74 53.74,37.74 v53.6,37.67 53.46,37.81 52.84,37.81 R9.2 52.7,37.74 45.22,37.74 38.64,31.16 17.87,31.16 17.73,31.3 17.73,33.1 | v85.66,64.82 85.66,67.94 D7.2 | v85.39,51.59 85.39,51.45 | 126.24,32.13 126.24,28.05 125.14,26.94 110.52,26.94 87.39,50.07 R2_PINH1.1
  Top 0.3: 37.4,77.77 76.04,77.77 85.59,68.21 D7.2
  Bottom 0.3: v52.08,108.1 39.54,108.1 v39.47,107.96 38.99,108.45 v31.86,108.45 31.72,108.38 28.67,108.38 20.43,100.14 v13.43,100.14 | v52.42,25.07 52.42,26.87 v57.34,31.79 57.27,31.93 53.6,35.6 v53.6,37.67 | v85.66,64.82 85.66,51.87 v85.39,51.59
32KHZ
  Top 0.15: R2_PINH1.2 85.94,50.21 83.17,50.21 80.95,52.42 80.95,52.7 U3.1 80.88,52.42 25.55,52.42 17.94,44.81 17.94,44.53 U2.9
DN
  Top 0.15: J2.A7 164.4,54.29 164.95,54.29 165.16,54.09 165.16,53.53 164.95,53.32 164.4,53.32 J2.B7 164.95,53.25 166.06,52.15 166.06,50.9 165.51,50.35 163.91,50.35 163.78,50.21 162.74,50.21 160.31,47.78 154.22,47.78 D1.4
DP
  Top 0.15: 163.57,54.09 163.78,53.88 164.33,53.88 J2.A6 | 163.57,54.09 163.57,54.57 163.78,54.78 164.33,54.78 J2.B6 | D1.6 154.22,49.72 158.03,53.53 158.03,53.6 158.31,53.88 163.29,53.88 163.5,54.09 163.57,54.09
EPD_3V3  (via drill 0.3)
  Top 0.3: v64.54,41.48 59.9,41.48 TP17.TP | v65.86,40.17 67.24,40.17 68,39.4 L1.2 | FH34SRJ-24S-0.5SH_99_1.16 66.89,14.82 67.31,14.82 FH34SRJ-24S-0.5SH_99_1.15 67.38,14.96 67.38,15.31 67.59,15.51 69.32,15.51 71.05,17.24 71.05,17.73 72.3,18.98 EPD_C5.2 72.23,19.11 72.23,20.15 69.25,23.13 69.25,27.77 C7.1 69.11,27.91 65.86,27.91 | 65.86,27.91 61.84,27.91 59.28,30.47 58.66,30.47 Q2.2 | v65.86,28.05 65.86,27.91
  Bottom 0.3: v64.54,41.48 v65.86,40.17 v65.86,28.05
EPD_3V3_C  (via drill 0.3)
  Top 0.3: 56.78,33.52 56.78,30.54 Q2.1 | 56.78,33.52 57.2,33.93 R_CL1.1 | v26.18,55.89 20.5,61.56 20.5,61.98 U2.18 | v40.37,41.69 55.26,41.69 TP13.TP | v50.48,33.59 56.65,33.59 56.78,33.52
  Bottom 0.3: v26.18,55.89 v40.37,41.69 40.51,41.62 48.54,33.59 v50.48,33.59
EPD_BUSY  (via drill 0.3)
  Top 0.15: v71.61,13.57 71.19,13.57 70.36,14.4 70.36,14.75 FH34SRJ-24S-0.5SH_99_1.9 | U2.26 10.25,61.98 10.25,61.7 8.93,60.39 7.62,60.39 7.27,60.73 7.27,60.8 v6.86,61.22 6.86,64.13 9.56,66.83 9.56,70.7 TP9.TP
  Bottom 0.15: v71.61,13.57 69.18,11.15 29.71,11.15 3.67,37.19 3.67,58.03 v6.86,61.22
EPD_CS  (via drill 0.3)
  Top 0.15: v10.8,37.05 12.81,37.05 D6.2 | v9.35,35.6 6.44,35.6 TP10.TP | v19.8,43.42 20.43,44.04 20.43,44.46 U2.11 | v68.77,13.64 68.77,14.75 FH34SRJ-24S-0.5SH_99_1.12 | v48.2,22.02 48.2,31.93 52.77,36.5 R9.1
  Bottom 0.15: v9.35,35.6 9.94,36.18 | 9.94,36.18 v10.8,37.05 10.87,37.05 17.24,43.42 v19.8,43.42 | v68.77,13.64 68.56,13.64 67.59,12.67 57.55,12.67 v48.2,22.02 24.1,22.02 9.94,36.18
EPD_DC  (via drill 0.3)
  Top 0.15: v69.6,13.78 69.39,13.99 69.39,14.75 FH34SRJ-24S-0.5SH_99_1.11 | v4.16,37.6 3.05,38.71 TP11.TP | v12.81,42.73 12.81,44.46 U2.5
  Bottom 0.15: v69.6,13.78 68.21,12.4 29.36,12.4 7.72,34.04 | v4.16,37.6 7.72,34.04 | v12.81,42.73 12.81,40.1 8.45,35.73 8.45,35.39 8.59,35.25 8.59,34.9 7.72,34.04
EPD_RST  (via drill 0.3)
  Top 0.15: v70.15,15.58 69.87,15.31 69.87,14.82 FH34SRJ-24S-0.5SH_99_1.10 | v41.97,11.63 41.48,11.63 40.79,12.33 TP12.TP 40.79,12.4 41.83,13.44 v41.83,33.59 | v23.2,55.19 16.69,61.7 16.69,61.98 U2.21
  Bottom 0.15: v70.15,15.58 70.15,15.03 71.12,14.06 71.12,13.5 69.25,11.63 v41.97,11.63 | v23.2,55.19 23.48,55.19 41.83,36.84 v41.83,33.59
FLASH_CS  (via drill 0.3)
  Top 0.15: v16.76,32.55 15.86,31.65 R5.1 | v20.84,43.35 21.68,44.18 21.68,44.46 U2.12 21.74,44.53 v21.74,47.99 | v31.3,84.55 31.3,71.47 U1.1 31.37,71.4 31.44,71.33 v31.44,70.84 | v20.5,95.36 19.74,96.12 D9.2
  Bottom 0.15: v16.76,32.55 16.76,39.27 v20.84,43.35 | v20.5,95.36 v31.3,84.55 | v21.74,47.99 21.74,57.89 31.44,67.59 v31.44,70.84
GDR
  Top 0.15: FH34SRJ-24S-0.5SH_99_1.2 73.89,14.75 73.89,14.34 75.28,12.95 75.62,12.95 75.76,12.81 75.76,11.84 75.55,11.63 52.49,11.63 48.68,15.44 48.68,23.34 Q3.1 48.75,23.34 49.58,24.17 50.28,24.17 50.48,23.96 50.48,23.75 51.94,22.3 51.94,21.61 R4.2
GND  (via drill 0.3)
  Top 0.15: SENSOR2.1 157.13,12.19 156.78,12.19 156.09,11.5 156.09,7.06 156.3,6.86 157.75,6.86 158.38,7.48 C1.2 160.11,7.55 C2.2 160.11,7.62 160.87,8.38 160.87,12.47 160.38,12.95 SENSOR2.7 160.11,13.02 160.38,13.02 160.87,13.5 160.87,14.06 | 160.87,14.06 160.31,14.61 SENSOR2.5 | 160.87,14.06 160.94,14.06 164.54,17.66 165.3,17.66 J1.1 165.37,17.73 165.65,17.73 166.55,18.63 166.55,48.96 | J2.B12 164.4,50.97 164.4,50.76 J2.A1 164.33,50.69 v162.81,50.69 | v162.81,49.65 164.26,49.65 J2.MP3 165.02,48.96 166.55,48.96 | 166.55,48.96 166.96,48.96 | 166.96,48.96 168.83,48.96 J2.MP1 | J2.B1 164.4,57.13 164.4,57.41 J2.A12 164.4,57.48 164.4,58.59 164.95,59.14 J2.MP4 | 166.96,59.21 165.02,59.21 J2.MP4 | 166.96,59.21 168.83,59.21 J2.MP2 | C5_USB.2 152.28,45.57 152.28,47.16 152.56,47.44 152.56,48.13 152,48.68 151.73,48.68 D1.2 151.66,48.75 151.38,48.75 150.9,49.24 150.9,50.07 151.59,50.76 151.59,52.08 C4_USB.2 151.66,52.15 151.66,52.63 | 151.66,52.63 153.53,54.5 158.58,54.5 R2_USB1.1 158.65,54.5 158.65,56.51 158.24,56.92 R2_USB.2 158.17,56.99 157.54,57.62 157.54,58.66 157.68,58.79 158.79,58.79 159,58.59 164.33,58.59 J2.MP4 | 166.96,59.21 166.96,48.96 | C1_BAT2.2 124.44,35.66 124.44,34.21 123.47,33.24 123.47,30.47 124.79,29.16 C3.- 124.79,29.09 123.82,28.12 120.5,28.12 119.94,28.67 119.94,28.81 IC4.2 119.87,28.67 118.83,27.63 114.26,27.63 R1_PWRUSB.1 114.19,27.63 113.5,27.63 110.8,30.33 C1_BAT.2 110.73,30.4 110.73,30.61 110.11,31.23 110.11,58.66 | U4.4 124.3,61.91 124.3,61.5 124.79,61.01 125,61.01 U4.9 | U4.1 125.76,61.84 125.76,61.5 125.27,61.01 125.07,61.01 U4.9
  Top 0.15: U4.6 124.72,60.04 124.72,61.01 U4.9 | MCP1.2 122.23,58.17 122.23,57.96 122.78,57.41 123.2,57.41 124.1,56.51 124.86,56.51 125.55,55.82 125.55,55.12 126.66,54.02 126.66,53.88 R2_BAT.1 126.73,53.81 127.91,52.63 151.66,52.63 | MCP1.2 122.23,57.89 121.6,57.27 120.43,57.27 120.08,57.62 120.08,57.76 119.46,58.38 119.46,58.52 C1_BAT1.2 119.39,58.59 119.32,58.66 117.79,58.66 C2_BAT.2 117.72,58.66 110.11,58.66 | U4.9 124.65,60.59 123.33,60.59 122.23,59.49 122.23,58.24 MCP1.2 | 85.49,61.05 93.07,53.46 93.49,53.46 C8.2 93.56,53.46 95.7,53.46 96.4,54.16 C10_SUPERCAP.1 96.47,54.22 100.83,58.59 102.84,58.59 TP5.TP 102.91,58.66 110.11,58.66 | 85.49,61.05 84.76,61.77 84.76,62.05 U3.13 | 43.97,101.87 43.97,107.27 45.01,108.31 C5.2 45.01,108.24 47.51,108.24 RESET_BUTTON.1 47.58,108.24 50.97,108.24 RESET_BUTTON.2 | 43.97,101.87 43.97,96.47 C_DELAY.1 | U1.4 31.37,67.66 33.31,67.66 35.18,69.53 U1.9 | D12.1 26.32,65.58 29.29,65.58 31.3,67.59 U1.4 | 40.93,101.87 40.93,105.68 38.43,108.17 CHANGE_BUTTON.2 38.36,108.17 37.6,107.41 34.14,107.41 33.24,108.31 33.03,108.31 C10.2 | 40.93,101.87 40.93,96.81 IC2.3 40.86,96.81 40.3,96.26 37.81,96.26 32.83,91.27 32.83,70.7 31.86,69.74 31.16,69.74 30.61,69.18 30.61,68.7 31.3,68 31.3,67.73 U1.4 | v42.94,101.87 43.97,101.87 | v41,101.87 40.93,101.87 | 58.86,12.33 58.17,12.33 54.43,16.07 R2.1 54.36,16.07 53.53,15.24 50.48,15.24 49.65,16.07 49.65,16.21 SJ1.1 | 58.86,12.33 61.77,12.33 FH34SRJ-24S-0.5SH_99_1.MP2 61.84,12.33 75.28,12.33 FH34SRJ-24S-0.5SH_99_1.MP1 | FH34SRJ-24S-0.5SH_99_1.8 70.84,14.82 70.84,16.21 72.3,17.66 EPD_C5.1 72.37,17.73 73.75,19.11
  Top 0.15: 73.75,19.11 74.65,19.11 EPD_C2.1 74.72,19.18 75.28,19.74 77.01,19.74 77.14,19.6 77.14,18.77 76.45,18.07 76.45,17.94 EPD_C1.1 | 73.75,19.11 73.75,19.18 70.5,22.44 70.5,27.84 C7.2 70.43,27.91 70.22,27.91 69.25,28.88 63.5,28.88 D11.1 63.43,28.95 61.35,28.95 59.14,31.16 58.1,31.16 57.34,30.4 57.34,28.46 54.57,25.69 54.57,25.62 | FH34SRJ-24S-0.5SH_99_1.17 66.34,14.82 66.34,15.17 68.63,17.45 EPD_C8.1 68.7,17.45 68.9,17.66 69.32,17.66 | 69.32,17.66 70.22,17.66 EPD_C7.1 | R4.1 53.25,21.61 53.25,23.61 EPD_C6.1 53.18,23.68 52.77,23.68 52.01,24.45 51.04,24.45 50.9,24.59 50.9,25.42 51.11,25.62 54.57,25.62 | v63.71,16.62 63.29,17.04 63.29,17.31 EPD_C11.1 | v64.68,16.76 64.68,17.24 64.89,17.45 EPD_C10.1 65.03,17.52 65.65,18.14 | 60.87,19.39 60.87,18.49 61.49,17.87 61.49,17.66 EPD_C12.1 | 60.87,19.39 61.15,19.67 65.23,19.67 65.65,19.25 | 65.65,18.14 65.65,19.25 | EPD_C9.1 66.76,17.73 66.13,17.73 65.72,18.14 65.65,18.14 | D3.1 v64.06,42.04 61.01,42.04 60.39,42.66 58.03,42.66 53.81,38.44 28.46,38.44 25.48,35.46 TP4.TP 25.35,35.53 v19.8,35.53 | 54.57,25.62 60.8,19.39 60.87,19.39 | 69.32,17.66 69.32,19.11 68.83,19.6 66.06,19.6 65.72,19.25 65.65,19.25 | v58.86,13.44 58.86,12.33 | 13.57,35.6 D8.1 15.03,35.66 17.04,35.66 D10.1 17.11,35.66 17.24,35.53 v18.28,35.53 | 13.57,35.6 12.88,35.6 D6.1 | 12.88,51.73 13.43,51.73 U2.29_5 | 12.88,51.73 12.26,51.73 U2.29_2 12.26,51.8 12.26,52.91 U2.29_3 12.26,52.98 13.43,52.98 U2.29_6 | 12.88,50.48 13.43,50.48 U2.29_4 13.5,50.48 14.68,50.48 U2.29_7 14.75,50.55 14.75,51.73 U2.29_8 14.75,51.8 14.75,52.98 U2.29_9 | 12.88,50.48 12.26,50.48 U2.29_1 12.19,50.41 v11.56,49.79
  Top 0.15: v7.76,45.98 7.76,44.53 U2.1 | 12.88,50.48 12.88,51.73 | 13.57,35.6 13.57,40.1 v10.32,43.35 | v3.67,92.8 3.88,92.59 4.78,92.59 J4.P6 | J4.G3 1.18,82.27 1.18,93.14 2.22,94.18 v2.22,94.25 2.22,95.36 J4.G4 2.22,95.43 2.22,100.28 4.02,102.08 5.19,102.08 5.89,101.38 7.13,101.38 C9.2 7.2,101.31 12.88,101.31 18.07,96.12 D9.1 | 21.33,107.41 20.5,108.24 19.67,108.24 C6.2 | 21.33,107.41 24.79,107.41 25.55,108.17 BOOT_BUTTON.2 | D9.1 18.14,96.12 18.14,93.7 15.44,91 J4.G2 15.44,90.93 16.2,90.17 16.2,87.05 15.44,86.29 15.44,85.25 J4.G1 15.37,85.18 13.85,83.66 13.85,73.27 10.46,69.88 10.46,67.31 7.76,64.61 7.76,62.05 U2.28 7.76,61.98 v7.76,60.87 | 21.33,101.87 21.33,99.31 18.21,96.19 D9.1 | 21.33,101.87 21.33,107.41 | 21.33,101.87 v22.92,101.87 | v85.11,60.66 85.49,61.05
  Top 0.152: 0,111.2 0,0 60,0 60,10 78.2,10 78.2,0 170.2,0 170.2,67.2 92.2,67.2 92.2,111.2 54,111.2 54,110.5 20.1,110.5 20.1,111.2 0,111.2
  Bottom 0.15: v162.81,49.65 v162.81,50.69 | v42.94,101.87 v41,101.87 v22.92,101.87 | v64.68,16.76 64.54,16.62 v63.71,16.62 63.71,16.69 63.57,16.83 | 63.57,16.83 63.57,19.32 64.06,19.81 v64.06,42.04 64.06,44.74 79.98,60.66 v85.11,60.66 | v58.86,13.44 59.69,13.44 63.09,16.83 63.57,16.83 | v18.28,35.53 v19.8,35.53 | v10.32,43.35 7.76,45.91 v7.76,45.98 v11.56,49.79 11.56,57.06 v7.76,60.87 | v2.22,94.25 v3.67,92.8
  pour Top: 54.04,110.44 54.02,110.42 20.08,110.42 20.06,110.44 20.04,110.46 20.02,110.48 20.02,111.12 0.08,111.12 0.08,0.08 59.92,0.08 59.92,10.02 59.94,10.04 59.96,10.06 59.98,10.08 78.22,10.08 78.24,10.06 78.26,10.04 78.28,10.02 78.28,0.08 170.12,0.08 170.12,67.12 92.18,67.12 92.16,67.14 92.14,67.16 92.12,67.18 92.12,111.12 54.08,111.12 54.08,110.48 54.06,110.46
  pour Bottom: 54.04,110.44 54.02,110.42 20.08,110.42 20.06,110.44 20.04,110.46 20.02,110.48 20.02,111.12 0.08,111.12 0.08,0.08 59.92,0.08 59.92,10.02 59.94,10.04 59.96,10.06 59.98,10.08 78.22,10.08 78.24,10.06 78.26,10.04 78.28,10.02 78.28,0.08 170.12,0.08 170.12,67.12 92.18,67.12 92.16,67.14 92.14,67.16 92.12,67.18 92.12,111.12 54.08,111.12 54.08,110.48 54.06,110.46
GPIO8
  Top 0.15: R1.1 18.49,31.86 18.49,31.99 19.32,32.83 19.32,44.32 19.18,44.46 U2.10
I2C_PW  (via drill 0.3)
  Top 0.3: R2_PINH.2 156.85,7.48 157.06,7.48 158.38,8.8 C1.1 158.58,8.86 160.11,8.86 C2.1 160.11,9 160.11,12.05 SENSOR2.8 160.04,12.26 159.69,12.26 159.28,12.67 159.28,13.02 | 159.28,13.02 159.28,13.3 159.76,13.78 160.04,13.78 SENSOR2.6 | 159.28,13.02 157.2,13.02 SENSOR2.2 157.06,13.09 86.49,13.09 65.58,34 59.9,34 58.52,35.39 R1_PINH.2 58.38,35.53 56.78,37.12 53.39,37.12 53.32,37.19 v46.19,37.19 | v26.45,56.92 21.74,61.63 21.74,61.98 U2.17
  Bottom 0.3: v26.45,56.92 v46.19,37.19
INT_RTC
  Top 0.15: 80.09,65.82 73.34,59.07 TP15.TP | 80.09,65.82 80.75,66.48 82.2,66.48 82.34,66.34 82.34,65.37 83.38,64.33 89.19,64.33 90.58,62.95 93.69,62.95 R1_PINH1.2 | 82.55,54.02 25.9,54.02 16.69,44.81 16.69,44.53 U2.8 | 82.55,54.02 83.45,53.12 83.45,52.77 U3.3 | 80.09,65.82 81.58,64.33 81.65,64.33 82.75,63.23 82.75,54.29 82.55,54.09 82.55,54.02
IO/BOOT  (via drill 0.3)
  Top 0.15: C6.1 19.67,109.56 21.88,109.56 22.02,109.69 BOOT_BUTTON.4 22.16,109.69 22.92,108.93 26.45,108.93 26.49,108.97 | 26.49,108.97 27.29,109.76 R_BOOT.1 | v24.52,63.16 24.31,62.95 24.31,62.05 U2.15 | v18.77,87.46 18.77,93 26.52,100.76 26.52,108.93 26.49,108.97
  Bottom 0.15: v24.52,63.16 24.52,81.72 v18.77,87.46
IO/CHANGE
  Top 0.15: R_CHANGE.1 40.16,109.76 40.03,109.76 39.2,108.93 35.73,108.93 34.97,109.69 CHANGE_BUTTON.4 33.03,109.69 C10.1 32.96,109.62 32.34,109 32.34,100.34 14.13,82.13 14.13,62.05 U2.23
MISO  (via drill 0.3)
  Top 0.15: U1.2 31.3,70.15 29.36,70.15 26.32,67.1 D12.2 26.25,67.1 v14.61,67.1 | v8.1,35.11 11.43,31.79 R8.1 | v8.38,60.87 8.38,61.08 9,61.7 U2.27 | v3.05,92.8 3.88,93.63 4.99,93.63 J4.P7 | v4.99,64.82 5.05,64.82 7.13,66.9 TP6.TP 7.2,66.9 v8.17,67.87
  Bottom 0.15: v8.1,35.11 8.1,45.01 7.27,45.84 7.27,61.01 7.62,61.36 | 7.62,61.36 7.89,61.36 v8.38,60.87 | v3.05,92.8 3.05,66 4.61,64.44 | 4.61,64.44 7.62,61.43 7.62,61.36 | 4.61,64.44 v4.99,64.82 | v14.61,67.1 10.25,67.1 9.49,67.87 v8.17,67.87
MOSI  (via drill 0.3)
  Top 0.15: TP7.TP 41.41,76.38 51.04,76.38 52.35,75.07 52.35,74.03 45.98,67.66 U1.5 39.06,67.66 v37.33,67.66 | 52.56,22.79 52.56,21.12 59.76,13.92 67.31,13.92 67.8,14.4 67.8,14.75 FH34SRJ-24S-0.5SH_99_1.14 | 52.56,22.79 51.66,23.68 R7.1 | v60.59,30.33 63.43,30.33 D11.2 | v52.63,22.79 52.56,22.79 | v18.84,40.72 15.37,44.18 15.37,44.46 U2.7 | v13.37,81.58 5.75,89.2 5.05,89.2 J4.P3
  Bottom 0.15: v60.59,30.33 60.18,30.33 v52.63,22.79 52.01,22.79 34.07,40.72 21.33,40.72 | 21.33,40.72 v18.84,40.72 | v13.37,81.58 13.37,68.97 21.26,61.08 | 21.26,61.08 21.26,43.56 21.33,43.49 21.33,40.72 | v37.33,67.66 35.25,67.66 31.58,71.33 31.3,71.33 25,65.03 25,63.02 23.06,61.08 21.26,61.08
N$1
  Top 0.15: FH34SRJ-24S-0.5SH_99_1.22 63.85,14.82 63.85,16.14 64.19,16.48 64.19,18.07 64.89,18.77 EPD_C10.2
N$11
  Top 0.15: R2_USB1.2 158.72,53.12 163.5,53.12 163.78,52.84 164.33,52.84 J2.A5
N$15
  Top 0.15: R2_USB.1 158.24,58.17 161.49,58.17 163.84,55.82 164.33,55.82 J2.B5
N$16
  Top 0.15: 118.97,28.88 119.39,29.29 119.39,29.36 119.53,29.5 120.29,29.5 120.91,28.88 IC4.3 | 118.97,28.88 117.03,30.82 D2.1 116.96,30.89 113.92,33.93 113.92,41.27 118.28,45.64 118.28,55.12 119.39,56.23 119.39,57.27 C1_BAT1.1 | 118.97,28.88 IC4.1
N$17
  Top 0.15: C4.1 92.93,38.57 88.16,38.57 87.53,37.95 D4.1 87.46,37.95 80.88,44.53 70.08,44.53 D3.2
N$18
  Top 0.15: R1_BAT.2 126.38,57.27 126.17,57.27 125.27,58.17 123.2,58.17 MCP1.1
N$19
  Top 0.15: CHG_LED.C 126.38,55.4 126.38,55.95 125.14,57.2 R1_BAT.1
N$20
  Top 0.15: R2_BAT.2 125.34,53.88 124.93,53.88 123.2,55.61 MCP1.5
N$21
  Top 0.15: FH34SRJ-24S-0.5SH_99_1.24 62.81,14.82 62.81,16.27 62.26,16.83 62.26,18.21 61.56,18.91 EPD_C12.2
N$22
  Top 0.15: FH34SRJ-24S-0.5SH_99_1.20 64.89,14.82 64.89,15.38 66.62,17.11 67.31,17.11 67.93,17.73 67.93,18.01 EPD_C8.2
N$23  (via drill 0.3)
  Top 0.15: v66.76,16.62 65.37,15.24 65.37,14.82 FH34SRJ-24S-0.5SH_99_1.19 | v71.12,18.56 70.7,18.56 70.29,18.98 EPD_C7.2
  Bottom 0.15: v66.76,16.62 69.18,16.62 v71.12,18.56
N$24
  Top 0.15: FH34SRJ-24S-0.5SH_99_1.18 65.79,14.75 65.79,14.4 65.58,14.2 62.53,14.2 53.95,22.79 53.95,24.24 53.25,24.93 EPD_C6.2
N$25
  Top 0.15: FH34SRJ-24S-0.5SH_99_1.5 72.37,14.82 72.37,15.58 74.65,17.87 EPD_C2.2
N$26
  Top 0.15: FH34SRJ-24S-0.5SH_99_1.4 72.85,14.82 72.85,15.17 75,17.31 75.28,17.31 75.76,17.8 75.76,18.49 76.38,19.11 EPD_C1.2
N$27
  Top 0.15: IC2.5 38.23,94.87 39.54,94.87 40.1,94.32 43.14,94.32 43.9,95.08 C_DELAY.2
N$28
  Top 0.15: R_CAPACITOR.2 83.1,65.79 83.1,67.59 83.58,68.07 D7.1
PREVGH  (via drill 0.3)
  Top 0.15: v66,17.11 64.33,15.44 64.33,14.82 FH34SRJ-24S-0.5SH_99_1.21 | v67.45,18.35 66.83,18.98 EPD_C9.2 | v88.29,33.93 90.79,33.93 D5.1
  Bottom 0.15: v66,17.11 66.2,17.11 v67.45,18.35 67.52,18.35 83.1,33.93 v88.29,33.93
PREVGL  (via drill 0.3)
  Top 0.15: FH34SRJ-24S-0.5SH_99_1.23 63.29,14.82 63.29,16.21 62.53,16.97 62.53,17.94 63.23,18.63 EPD_C11.2 63.29,18.7 63.78,19.18 v64.06,19.18 | v88.43,37.88 91,37.88 D4.2
  Bottom 0.15: v88.43,37.88 82.75,37.88 v64.06,19.18
RESE
  Top 0.15: 51.11,19.04 53.88,19.04 59.83,13.09 72.02,13.09 73.27,14.34 73.27,14.75 FH34SRJ-24S-0.5SH_99_1.3 | 51.11,19.04 50.48,18.42 R3.2 | Q3.2 50,23.34 50,20.22 51.11,19.11 51.11,19.04
RESE'
  Top 0.15: 51.73,17.45 51.73,16.9 51.18,16.34 SJ1.2 | 51.73,17.45 51.73,18.35 R3.1 | 51.73,17.45 54.36,17.45 R2.2
RESET  (via drill 0.3)
  Top 0.15: R_RESET.1 53.25,109.48 51.24,109.48 51.04,109.69 RESET_BUTTON.3 50.97,109.69 47.58,109.69 RESET_BUTTON.4 45.08,109.69 C5.1 45.01,109.62 42.45,107.06 42.45,96.26 41.13,94.94 41,94.94 IC2.1 40.93,94.87 v40.16,94.87 | v11.08,45.64 10.32,44.88 10.32,44.53 U2.3 | v13.43,45.64 21.61,53.81 24.72,53.81 v34.9,63.99
  Bottom 0.15: v13.43,45.64 v11.08,45.64 | v34.9,63.99 40.16,69.25 v40.16,94.87
RTC_RST  (via drill 0.3)
  Top 0.15: v75.07,55.12 63.71,66.48 37.19,66.48 35.18,64.47 25.21,64.47 22.99,62.26 22.99,62.05 U2.16 | v83.72,54.16 84.69,53.19 84.69,52.77 U3.4
  Bottom 0.15: v75.07,55.12 82.75,55.12 v83.72,54.16
RX
  Top 0.15: U2.24 12.88,62.05 12.88,65.3 TP2.TP
SCK  (via drill 0.3)
  Top 0.15: TP8.TP 51.11,74.51 45.57,68.97 39.13,68.97 U1.6 39.06,68.97 v38.5,69.53 | v3.88,91.41 4.99,91.41 J4.P5 | v68.28,13.99 68.28,14.75 FH34SRJ-24S-0.5SH_99_1.13 | v17.8,36.43 17.11,37.12 D10.2 17.04,37.19 17.04,38.3 14.13,41.2 14.13,44.46 U2.6 14.06,44.53 v14.06,45.64 | v15.03,31.79 13.85,31.79 R6.1
  Bottom 0.15: 7.41,91.41 16.62,91.41 v38.5,69.53 | 7.41,91.41 v3.88,91.41 | v68.28,13.99 60.66,13.99 59.62,12.95 57.89,12.95 34.42,36.43 v17.8,36.43 17.8,32.96 16.62,31.79 v15.03,31.79 | 7.41,91.41 7.41,62.47 14.06,55.82 v14.06,45.64
SCL  (via drill 0.3)
  Top 0.15: v156.78,11.57 156.78,8.8 R2_PINH.1 | v156.3,13.99 156.85,14.54 157.13,14.54 SENSOR2.4 | v164.75,21.4 165.3,20.85 165.3,20.71 J1.4 | v122.71,59.35 125,59.35 125.2,59.56 125.2,59.9 U4.7 | v81.58,63.23 81.58,62.74 80.95,62.12 U3.16 80.88,62.05 76.66,57.83 72.78,57.83 63.85,66.76 37.05,66.76 35.18,64.89 20.57,64.89 17.94,62.26 17.94,62.05 U2.20
  Bottom 0.15: 156.78,13.5 v156.78,11.57 | v156.3,13.99 156.78,13.5 | 162.63,19.29 156.85,13.5 156.78,13.5 | 162.63,19.29 v164.75,21.4 | v81.58,63.23 83.65,65.3 87.67,65.3 93.63,59.35 v122.71,59.35 122.64,59.28 162.63,19.29
SDA  (via drill 0.3)
  Top 0.15: v158.38,13.85 157.2,13.85 SENSOR2.3 | v165.92,21.4 166.27,21.05 166.27,20.36 165.65,19.74 165.37,19.74 J1.3 | v126.03,60.66 126.03,60.53 125.76,60.25 125.76,59.97 U4.8 | v81.51,63.85 81.65,63.71 81.72,63.71 82.2,63.23 82.2,62.12 U3.15 | v56.37,35.8 56.58,35.6 57.06,35.6 R1_PINH.1 | v22.85,57.96 19.18,61.63 19.18,61.98 U2.19
  Bottom 0.15: v165.92,21.4 165.68,21.16 | 165.68,21.16 v158.38,13.85 | v56.37,35.8 56.37,38.64 57.44,39.72 | 57.44,39.72 81.51,63.78 v81.51,63.85 83.24,65.58 87.81,65.58 92.73,60.66 v126.03,60.66 126.17,60.66 165.68,21.16 | v22.85,57.96 39.2,57.96 57.44,39.72
SRC  (via drill 0.3)
  Top 0.15: C4.2 92.93,37.33 90.72,37.33 87.39,34 D5.2 87.32,34 68.77,34 68.07,34.7 L1.1 68,34.7 v61.49,34.7 | v56.44,29.64 53.88,29.64 49.79,25.55 49.38,25.55 Q3.3
  Bottom 0.15: v61.49,34.7 v56.44,29.64
SS_SD
  Top 0.15: D8.2 15.03,37.12 15.03,39.89 11.56,43.35 11.56,44.46 U2.4 11.56,44.53 11.56,49.17 6.37,54.36 6.37,62.81 3.95,65.23 3.95,87.39 4.64,88.09 4.64,88.16 | 4.64,88.16 2.08,90.72 2.08,93.21 4.57,95.7 4.57,100.21 R10.1 | 4.64,88.16 5.33,88.16 J4.P2
TX
  Top 0.15: U2.25 11.56,62.05 11.56,67.94 11.63,68 TP1.TP
USB_D+  (via drill 0.3)
  Top 0.15: v118.69,44.81 152.63,44.81 152.84,45.01 152.84,48.82 152,49.65 151.73,49.65 D1.1 | v66.69,45.36 25.14,45.36 24.31,44.53 U2.14
  Bottom 0.15: v118.69,44.81 68.49,44.81 67.45,45.84 67.17,45.84 v66.69,45.36
USB_D-  (via drill 0.3)
  Top 0.15: v114.4,41.14 120.98,47.72 151.66,47.72 D1.3 | v67.31,45.36 66.83,45.84 24.1,45.84 22.99,44.74 22.99,44.53 U2.13
  Bottom 0.15: v114.4,41.14 71.53,41.14 v67.31,45.36
VBAT  (via drill 0.3)
  Top 0.3: Q1.3 117.59,54.43 117.59,57.27 117.66,57.34 C2_BAT.1 117.86,57.41 v118.56,57.41 | U4.3 124.79,61.91 125.27,61.91 U4.2 125.34,62.05 125.34,62.4 | 125.34,62.4 125.55,62.6 130.81,62.6 TP3.TP | 125.34,62.4 125.2,62.47 125,62.67 124.1,62.67 121.33,59.9 121.33,58.24 MCP1.3 121.12,58.17 120.7,57.76 v120.56,57.76
  Bottom 0.3: v118.56,57.41 120.22,57.41 v120.56,57.76
VBUS  (via drill 0.3)
  Top 0.3: v150.2,55.4 143.28,55.4 TP14.TP 143.14,55.33 128.87,55.33 v127.42,53.88 | v152.63,52.98 152.63,52.42 152.84,52.22 C4_USB.1 152.97,52.08 152.97,49.58 153.74,48.82 D1.5 154.15,48.68 153.8,48.68 153.32,48.2 153.32,47.37 153.53,47.16 153.53,45.57 C5_USB.1 153.67,45.5 156.78,42.38 157.34,42.38 PFMF.050.1.2 | 114.26,30.26 114.26,28.95 R1_PWRUSB.2 | 114.26,30.26 114.82,30.82 D2.2 114.95,30.96 v114.95,32.27 | C1_BAT.1 110.8,31.65 112.81,31.65 114.12,30.33 114.26,30.26 | CHG_LED.A 124.86,55.4 124.65,55.4 123.54,56.51 122.16,56.51 121.33,55.68 MCP1.4 121.26,55.47 119.66,53.88 Q1.1 119.59,53.32 119.25,52.98 v119.25,52.7
  Bottom 0.3: v152.63,52.98 v150.2,55.4 | v114.95,32.27 114.95,40.3 119.25,44.6 v119.25,52.7 119.39,52.77 120.5,53.88 v127.42,53.88
VRTC
  Top 0.3: C10_SUPERCAP.2 96.33,52.08 93.56,52.08 C8.1 93.42,52.22 92.8,52.22 83.58,61.43 83.58,61.98 U3.14 83.45,62.12 83.45,63.09 81.78,64.75 81.78,65.72 R_CAPACITOR.1
VUSB  (via drill 0.3)
  Top 0.3: 164.4,51.52 164.4,51.8 J2.B9 | 164.4,51.52 J2.A4 164.26,51.45 163.64,51.45 v163.36,51.18 | v163.36,43.84 161.91,42.38 PFMF.050.1.1 | J2.B4 164.38,51.54 164.4,51.52
  Bottom 0.3: v163.36,43.84 v163.36,51.18